# EAGLE board DWLQFP32 (EAGLE 7.5.0)
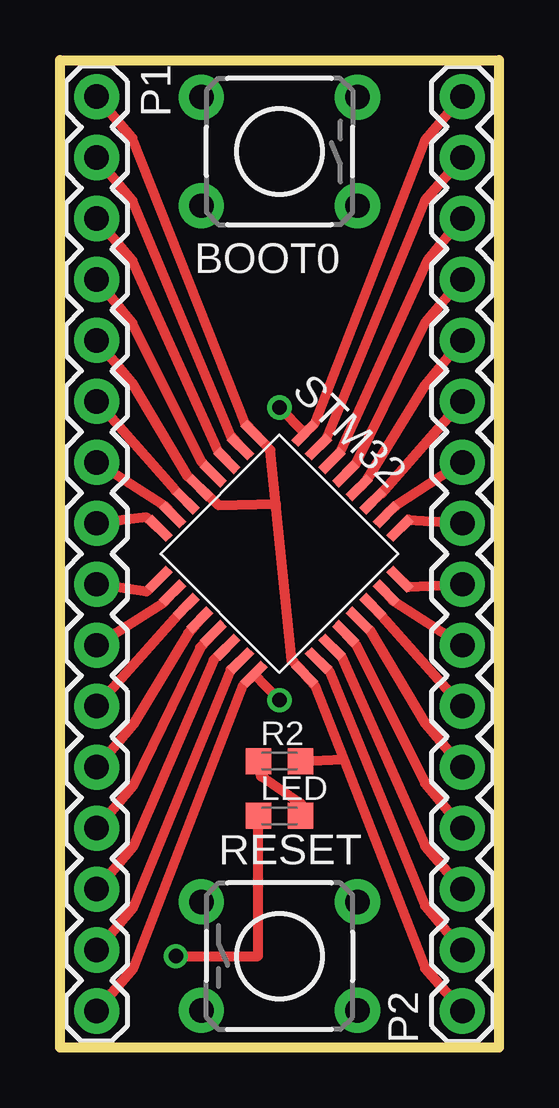
[diagram p0: board, top side]
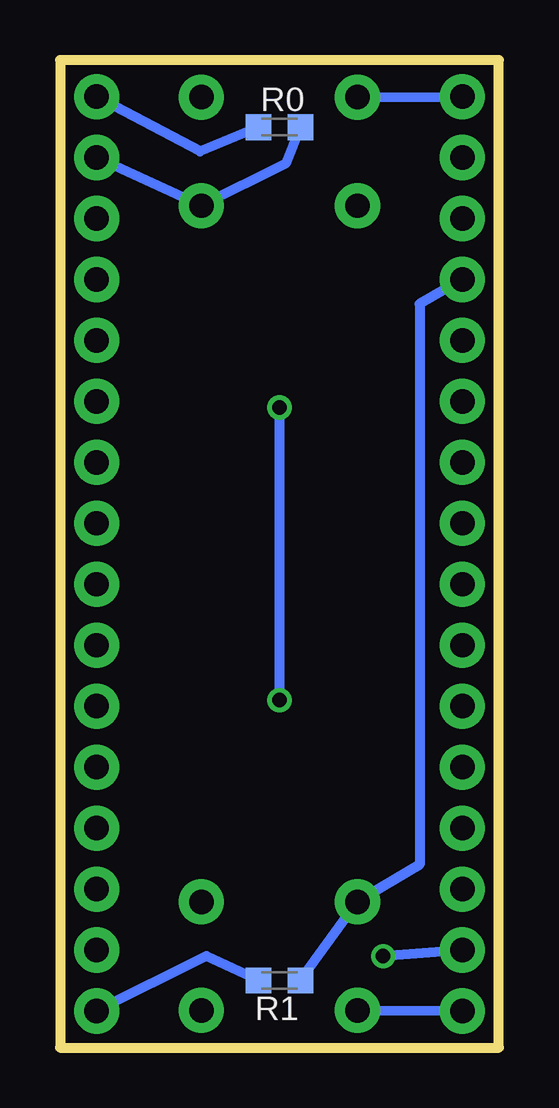
[diagram p1: board, bottom side, seen from below]

Size 18.29 x 41.15 mm. Coordinates in mm from the lower left corner, seen from the top.
Outline: 0,41.15 18.29,41.15 18.29,0 0,0 0,41.15
Copper layers (1*16): Top 0.035mm / dielectric 1.5mm / Bottom 0.035mm
Design rules "default": minimum track width 10mil, minimum drill 24mil, track to track 8mil, track to pad 8mil, pad to pad 8mil, via to via 8mil, smd to smd 8mil, copper to edge 40mil, drill to drill 8mil, minimum pad ring 10mil, minimum via ring 8mil, stop-mask expansion 4mil, vias tented up to drill 0mil, thermal gap 10mil

## Footprints (pad centres in the part's own frame; a part is rotated, then mirrored left to right if it is on the bottom)
TACTILE-PTH = drill 1.016 pad 1.88: 1 -3.251,2.261; 2 3.251,2.261; 3 -3.251,-2.261; 4 3.251,-2.261
C0603K = smd 1.05 x 1.08: 1 -0.875,0; 2 0.875,0
1X16 = drill 1.016 pad 1.88: 1 0,0; 2 2.54,0; 3 5.08,0; 4 7.62,0; 5 10.16,0; 6 12.7,0; 7 15.24,0; 8 17.78,0; 9 20.32,0; 10 22.86,0; 11 25.4,0; 12 27.94,0; 13 30.48,0; 14 33.02,0; 15 35.56,0; 16 38.1,0
LQFP32-7X7 = smd 1.2 x 0.4: 1 -4.3,2.8; 2 -4.3,2; 3 -4.3,1.2; 4 -4.3,0.4; 5 -4.3,-0.4; 6 -4.3,-1.2; 7 -4.3,-2; 8 -4.3,-2.8; 17 4.3,-2.8; 18 4.3,-2; 19 4.3,-1.2; 20 4.3,-0.4; 21 4.3,0.4; 22 4.3,1.2; 23 4.3,2; 24 4.3,2.8 | smd 0.4 x 1.2: 9 -2.8,-4.3; 10 -2,-4.3; 11 -1.2,-4.3; 12 -0.4,-4.3; 13 0.4,-4.3; 14 1.2,-4.3; 15 2,-4.3; 16 2.8,-4.3; 25 2.8,4.3; 26 2,4.3; 27 1.2,4.3; 28 0.4,4.3; 29 -0.4,4.3; 30 -1.2,4.3; 31 -2,4.3; 32 -2.8,4.3

## Placement (x,y rotation side)
BOOT0  [TACTILE-PTH]  9.14,37.34 180 top
LED  [C0603K]  9.14,9.65 0 top
P1  [1X16]  1.52,39.62 270 top
P2  [1X16]  16.76,1.52 90 top
R0  [C0603K]  9.14,38.35 0 bottom
R1  [C0603K]  9.14,2.79 180 bottom
R2  [C0603K]  9.14,11.94 0 top
RESET  [TACTILE-PTH]  9.14,3.81 0 top
STM32  [LQFP32-7X7]  9.14,20.57 315 top

## Library data of the parts
BOOT0 RESET = SparkFun-Electromechanical
LED R0 R1 R2 = resistor
P1 P2 = SparkFun-Connectors
STM32 = st-microelectronics

## Nets
GND: P1.16 P2.16 R0.1 RESET.3 STM32.16 STM32.32
NRST: P1.4 R1.1 RESET.1 STM32.4
PA0: P1.6 STM32.6
PA1: P1.7 STM32.7
PA2: P1.8 STM32.8
PF0: P1.2 STM32.2
PF1: P1.3 STM32.3
S$1: P1.9 STM32.9
S$2: P1.10 STM32.10
S$3: P1.11 STM32.11
S$4: P1.12 STM32.12
S$5: P1.13 STM32.13
S$6: P1.14 STM32.14
S$7: LED.1 P1.15 STM32.15
S$8: LED.2 R2.1
S$17: P2.8 STM32.24
S$18: P2.7 STM32.23
S$19: P2.6 STM32.22
S$20: P2.5 STM32.21
S$21: P2.4 STM32.20
S$22: P2.3 STM32.19
S$23: P2.2 STM32.18
S$25: P2.9 STM32.25
S$26: P2.10 STM32.26
S$27: P2.11 STM32.27
S$28: P2.12 STM32.28
S$29: P2.13 STM32.29
S$30: P2.14 STM32.30
S$31: BOOT0.1 P2.15 R0.2 STM32.31
VDD: BOOT0.4 P1.1 P1.5 P2.1 R1.2 R2.2 STM32.1 STM32.5 STM32.17

## Tracks (layer width: path | path; a pad name or v marks a point on that pad's centre or on a via)
GND  (via drill 0.6)
  Top 0.406: P2.16 15.21,37.79 10.61,25.99 STM32.32 v9.14,26.67 | P1.16 3.05,3.3 7.62,15.09 STM32.16 v9.14,14.48
  Bottom 0.406: RESET.3 P1.16 | R0.1 12.45,37.34 P2.16 | v9.14,26.67 v9.14,14.48
NRST
  Top 0.406: STM32.4 5.91,24.39 3.01,30.19 P1.4
  Bottom 0.406: R1.1 RESET.1 3.3,7.62 3.3,30.99 P1.4
PA0
  Top 0.406: STM32.6 4.81,23.19 P1.6
PA1
  Top 0.406: STM32.7 4.31,22.59 P1.7
PA2
  Top 0.406: STM32.8 3.61,22.09 P1.8
PF0
  Top 0.406: STM32.2 7.11,25.49 3.01,35.29 P1.2
PF1
  Top 0.406: STM32.3 6.61,24.79 3.01,32.79 P1.3
S$1
  Top 0.406: STM32.9 3.61,18.99 P1.9
S$2
  Top 0.406: STM32.10 4.32,18.54 P1.10
S$3
  Top 0.406: STM32.11 4.93,18.03 P1.11
S$4
  Top 0.406: STM32.12 5.33,17.27 3.05,13.46 P1.12
S$5
  Top 0.406: STM32.13 5.84,16.66 3.05,10.92 P1.13
S$6
  Top 0.406: STM32.14 6.4,16.16 3.05,8.38 P1.14
S$7  (via drill 0.6)
  Top 0.406: STM32.15 7.11,15.75 3.05,5.84 P1.15 | v4.83,3.81 8.25,3.81 LED.1
  Bottom 0.406: P1.15 v4.83,3.81
S$8
  Top 0.406: LED.2 10.03,10.16 8.38,11.3 R2.1
S$17
  Top 0.406: STM32.24 14.51,19.19 P2.8
S$18
  Top 0.406: STM32.23 13.91,18.59 P2.7
S$19
  Top 0.406: STM32.22 13.41,17.99 P2.6
S$20
  Top 0.406: STM32.21 12.91,17.39 15.21,13.49 P2.5
S$21
  Top 0.406: STM32.20 12.31,16.79 15.21,10.99 P2.4
S$22
  Top 0.406: STM32.19 11.71,16.29 15.21,8.39 P2.3
S$23
  Top 0.406: STM32.18 11.21,15.69 15.21,5.89 P2.2
S$25
  Top 0.406: STM32.25 14.51,21.99 P2.9
S$26
  Top 0.406: STM32.26 14.01,22.59 P2.10
S$27
  Top 0.406: STM32.27 13.41,23.09 P2.11
S$28
  Top 0.406: STM32.28 12.81,23.69 15.21,27.59 P2.12
S$29
  Top 0.406: STM32.29 12.31,24.29 15.21,30.19 P2.13
S$30
  Top 0.406: STM32.30 11.71,24.89 15.31,32.79 P2.14
S$31
  Top 0.406: STM32.31 11.11,25.39 15.21,35.29 P2.15
  Bottom 0.406: R0.2 8.89,36.83 BOOT0.1 P2.15
VDD
  Top 0.406: P1.1 3.01,37.89 7.71,25.99 STM32.1 8.76,24.89 8.99,22.66 | 11.82,12.01 10.61,15.09 STM32.17 9.65,16.13 8.99,22.66 | 11.82,12.01 15.21,3.29 P2.1 | P1.5 3.01,27.69 5.31,23.79 STM32.5 6.6,22.61 8.99,22.66 | R2.2 11.82,12.01
  Bottom 0.406: R1.2 12.19,3.81 P2.1 | BOOT0.4 P1.1